# EAGLE board 20200110_BehaviourSetup2 (EAGLE 9.5.2)
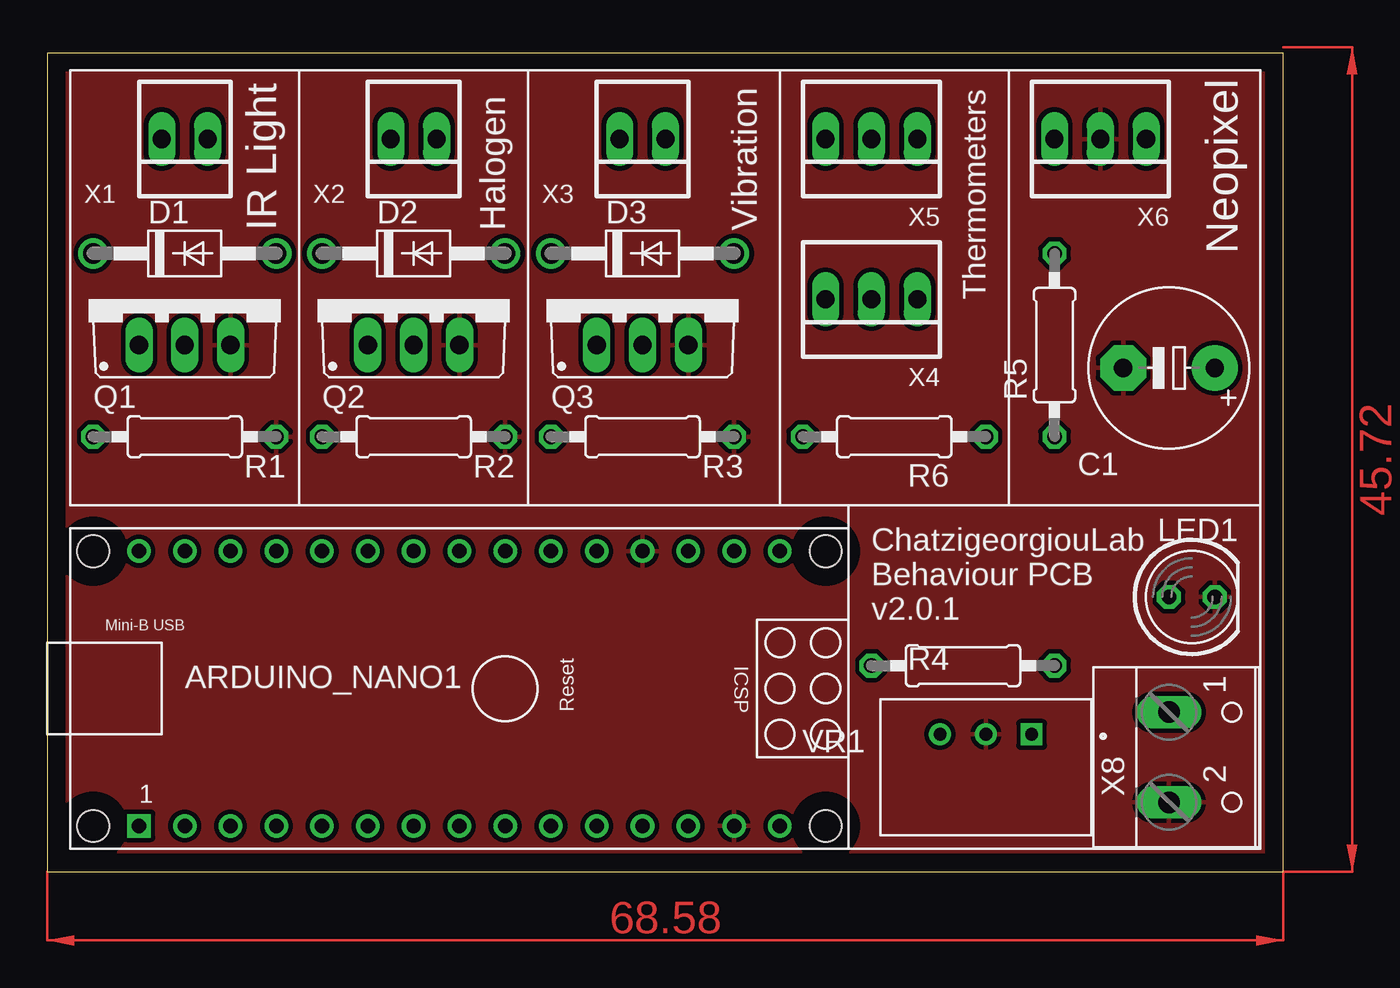
[diagram p0: board, top side]
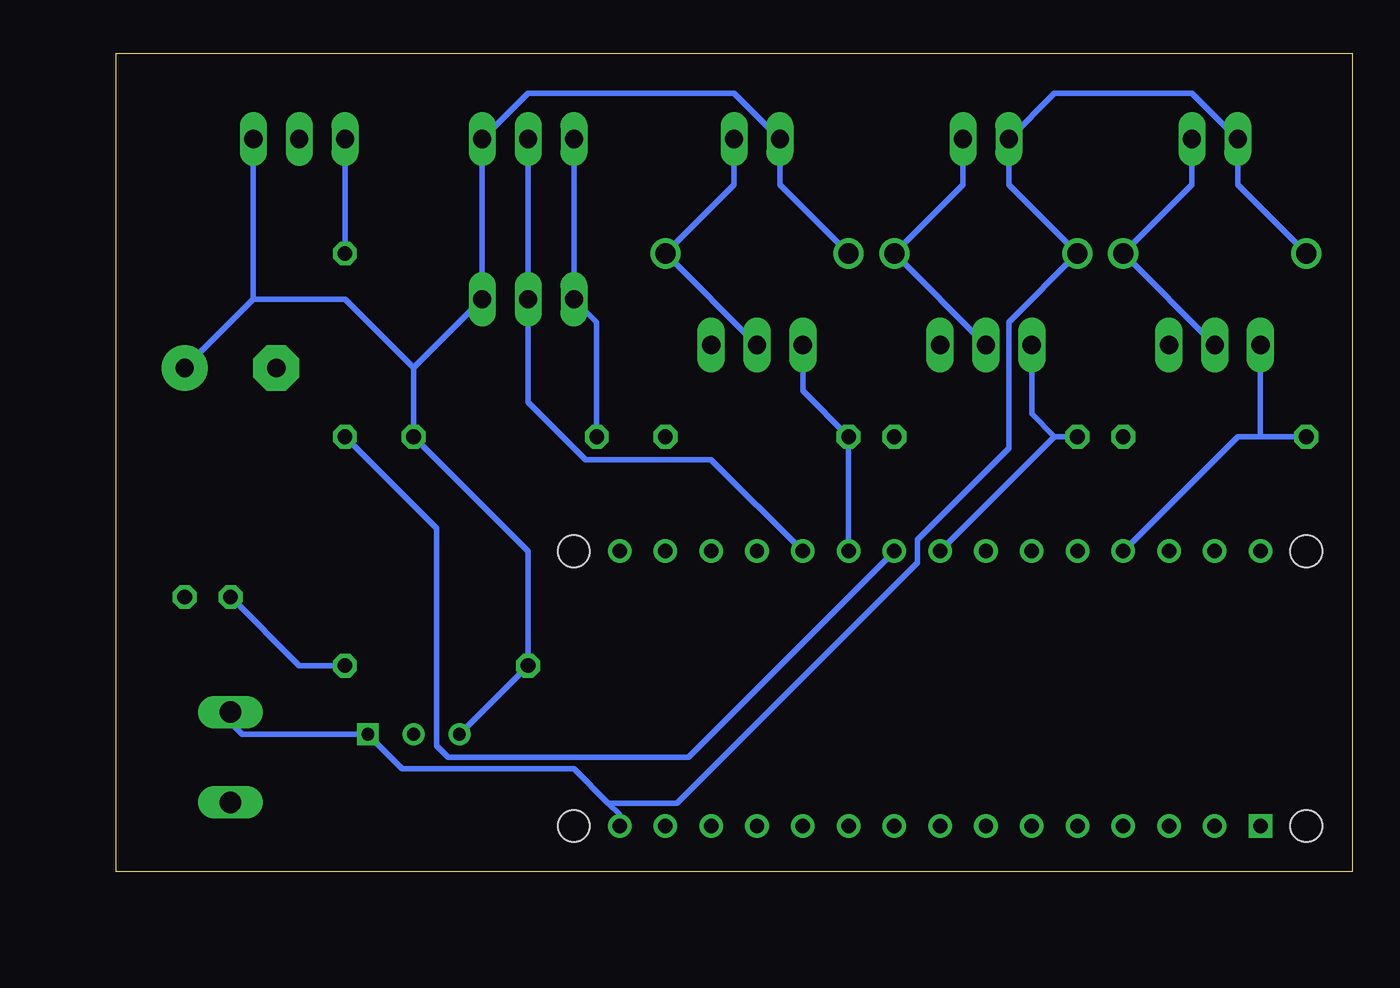
[diagram p1: board, bottom side, seen from below]

Size 68.56 x 45.39 mm. Coordinates in mm from the lower left corner, seen from the top.
Outline: 0,0 68.56,0 68.56,45.39 0,45.39 0,0
Copper layers (1*16): Top 0.035mm / dielectric 1.5mm / Bottom 0.035mm
Design rules "default": minimum track width 6mil, minimum drill 0.35mm, track to track 6mil, track to pad 6mil, pad to pad 6mil, via to via 6mil, smd to smd 6mil, copper to edge 40mil, drill to drill 6mil, minimum pad ring 10mil, minimum via ring 8mil, stop-mask expansion 4mil, vias tented up to drill 0mil, thermal gap 10mil
Net classes: 0 default: width 0.305 mm, drill 0.508 mm, clearance 0.254 mm

## Footprints (pad centres in the part's own frame; a part is rotated, then mirrored left to right if it is on the bottom)
ARDUINO_NANO = drill 0.8 square: 1 -20.32,-7.62 | drill 0.8: 2 -17.78,-7.62; 3 -15.24,-7.62; 4 -12.7,-7.62; 5 -10.16,-7.62; 6 -7.62,-7.62; 7 -5.08,-7.62; 8 -2.54,-7.62; 9 0,-7.62; 10 2.54,-7.62; 11 5.08,-7.62; 12 7.62,-7.62; 13 10.16,-7.62; 14 12.7,-7.62; 15 15.24,-7.62; 16 15.24,7.62; 17 12.7,7.62; 18 10.16,7.62; 19 7.62,7.62; 20 5.08,7.62; 21 2.54,7.62; 22 0,7.62; 23 -2.54,7.62; 24 -5.08,7.62; 25 -7.62,7.62; 26 -10.16,7.62; 27 -12.7,7.62; 28 -15.24,7.62; 29 -17.78,7.62; 30 -20.32,7.62 | hole 1.778: -22.86,-7.62; -22.86,7.62; 17.78,7.62; 17.78,-7.62
E5-8,5 = drill 1.016 pad 2.54: + -2.54,0 | drill 1.016 pad 2.54 octagon: - 2.54,0
DO41-10 = drill 1.118: A 5.08,0; C -5.08,0
LED5MM = drill 0.813 octagon: A -1.27,0; K 1.27,0
TO220BV = drill 1.016 long: D 0,-2.54; G -2.54,-2.54; S 2.54,-2.54
0207/10 = drill 0.813 octagon: 1 -5.08,0; 2 5.08,0
CONV_TSR_1-2450 = drill 0.71 pad 1.11 square: 1 -2.54,0 | drill 0.71 pad 1.11: 2 0,0; 3 2.54,0
22-23-2021 = drill 1 long: 1 -1.27,0; 2 1.27,0
22-23-2031 = drill 1 long: 1 -2.54,0; 2 0,0; 3 2.54,0
W237-102 = drill 1.194 long: 1 -2.5,-1.27; 2 2.5,-1.27

## Placement (x,y rotation side)
ARDUINO_NANO1  [ARDUINO_NANO]  25.4,10.16 0 top
C1  1000uF  [E5-8,5]  62.23,27.94 180 top
D1  1N4004  [DO41-10]  7.62,34.29 0 top
D2  1N4004  [DO41-10]  20.32,34.29 0 top
D3  1N4004  [DO41-10]  33.02,34.29 0 top
LED1  [LED5MM]  63.5,15.24 0 top
Q1  IRF540  [TO220BV]  7.62,31.75 0 top
Q2  IRF540  [TO220BV]  20.32,31.75 0 top
Q3  IRF540  [TO220BV]  33.02,31.75 0 top
R1  10k  [0207/10]  7.62,24.13 0 top
R2  10k  [0207/10]  20.32,24.13 0 top
R3  10k  [0207/10]  33.02,24.13 0 top
R4  220  [0207/10]  50.8,11.43 0 top
R5  330  [0207/10]  55.88,29.21 90 top
R6  4.7k  [0207/10]  46.99,24.13 180 top
VR1  TSR_1-2450  [CONV_TSR_1-2450]  52.07,7.62 180 top
X1  22-23-2021  [22-23-2021]  7.62,40.64 180 top
X2  22-23-2021  [22-23-2021]  20.32,40.64 180 top
X3  22-23-2021  [22-23-2021]  33.02,40.64 180 top
X4  22-23-2031  [22-23-2031]  45.72,31.75 180 top
X5  22-23-2031  [22-23-2031]  45.72,40.64 180 top
X6  22-23-2031  [22-23-2031]  58.42,40.64 180 top
X8  [W237-102]  63.5,6.35 270 top

## Library data of the parts
ARDUINO_NANO1 = ArduinoNanoV30
C1 = rcl; SPICEPREFIX: C
D1-D3 = diode
LED1 = led
Q1-Q3 = transistor-power
R1-R6 = rcl; SPICEPREFIX: R
VR1 = TSR_1-2450; AVAILABILITY: Unavailable; DESCRIPTION: Linear Regulator Replacement DC DC Converter 1 Output 5V 1A 6.5V - 36V Input; MF: Traco Power; MP: TSR 1-2450; PACKAGE: SIP-3 Tracopower; PRICE: None
X1-X3 = con-molex; MF: MOLEX; MPN: 22-23-2021; OC_FARNELL: 1462926; OC_NEWARK: 25C3832
X4-X6 = con-molex; MF: MOLEX; MPN: 22-23-2031; OC_FARNELL: 1462950; OC_NEWARK: 30C0862
X8 = con-wago-500; MPN: 237-102; OC_FARNELL: unknown; OC_NEWARK: 70K9898

## Nets
5V: ARDUINO_NANO1.12
+5V: C1.+ D3.C R4.1 R6.1 VR1.3 X3.2 X4.1 X5.1 X6.1
+12V: ARDUINO_NANO1.15 D1.C D2.C VR1.1 X1.2 X2.2 X8.1
GND: ARDUINO_NANO1.14 ARDUINO_NANO1.19 C1.- LED1.K Q1.S Q2.S Q3.S R1.2 R2.2 R3.2 VR1.2 X6.2 X8.2
N$1: ARDUINO_NANO1.27 Q1.G R1.1
N$3: ARDUINO_NANO1.23 Q2.G R2.1
N$5: ARDUINO_NANO1.21 Q3.G R3.1
N$6: D3.A Q3.D X3.1
N$7: LED1.A R4.2
N$8: R6.2 X4.3 X5.3
N$9: ARDUINO_NANO1.20 X4.2 X5.2
N$10: ARDUINO_NANO1.22 R5.1
N$11: R5.2 X6.3
N$12: D2.A Q2.D X2.1
N$13: D1.A Q1.D X1.1

## Tracks (layer width: path | path; a pad name or v marks a point on that pad's centre or on a via)
+5V
  Bottom 0.305: 60.96,31.75 X6.1 | C1.+ 60.96,31.75 | D3.C 31.75,38.1 X3.2 34.29,43.18 45.72,43.18 X5.1 X4.1 52.07,27.94 | VR1.3 R4.1 45.72,17.78 R6.1 52.07,27.94 | 60.96,31.75 55.88,31.75 52.07,27.94
+12V
  Bottom 0.305: D1.C 6.35,38.1 X1.2 8.89,43.18 16.51,43.18 X2.2 19.05,38.1 D2.C 19.05,30.48 19.05,23.5 24.13,18.41 24.13,17.14 37.47,3.81 41.27,3.81 | X8.1 62.23,8.26 61.59,7.62 VR1.1 52.7,5.71 43.18,5.71 41.27,3.81 | ARDUINO_NANO1.15 40.64,3.17 41.27,3.81
GND
  pour Top: 0,45.72 68.58,45.72 68.58,0 0,0 0,26.67
N$1
  Bottom 0.305: ARDUINO_NANO1.27 6.35,24.13 5.08,24.13 | R1.1 5.08,24.13 | 5.08,24.13 Q1.G
N$3
  Bottom 0.305: 16.51,24.13 ARDUINO_NANO1.23 | R2.1 16.51,24.13 | Q2.G 17.78,25.4 16.51,24.13
N$5
  Bottom 0.305: ARDUINO_NANO1.21 R3.1 30.48,26.67 Q3.G
N$6
  Bottom 0.305: X3.1 34.29,38.1 D3.A Q3.D
N$7
  Bottom 0.305: R4.2 58.42,11.43 LED1.A
N$8
  Bottom 0.305: R6.2 41.91,30.48 X4.3 X5.3
N$9
  Bottom 0.305: ARDUINO_NANO1.20 35.56,22.86 42.55,22.86 45.72,26.04 X4.2 X5.2
N$10
  Bottom 0.305: ARDUINO_NANO1.22 36.83,6.35 50.16,6.35 50.8,6.99 50.8,19.05 R5.1
N$11
  Bottom 0.305: X6.3 R5.2
N$12
  Bottom 0.305: X2.1 21.59,38.1 D2.A Q2.D
N$13
  Bottom 0.305: X1.1 8.89,38.1 D1.A Q1.D
(copper drawn outside any net)
  shapes: Top area x2

## Text on the board
tPlace: IR Light | Halogen | Vibration | Neopixel | Thermometers | ChatzigeorgiouLab / Behaviour PCB / v2.0.1